# Altium PCB PCB1.PcbDoc
Units mil, origin at the board's own origin, x right, y up, seen from the top; angles counter-clockwise.
Board outline 5621.02 x 7460.53 mil, 2 copper layers (Top Layer, Bottom Layer); 12 components, 16 nets, 84 pads, 0 vias.
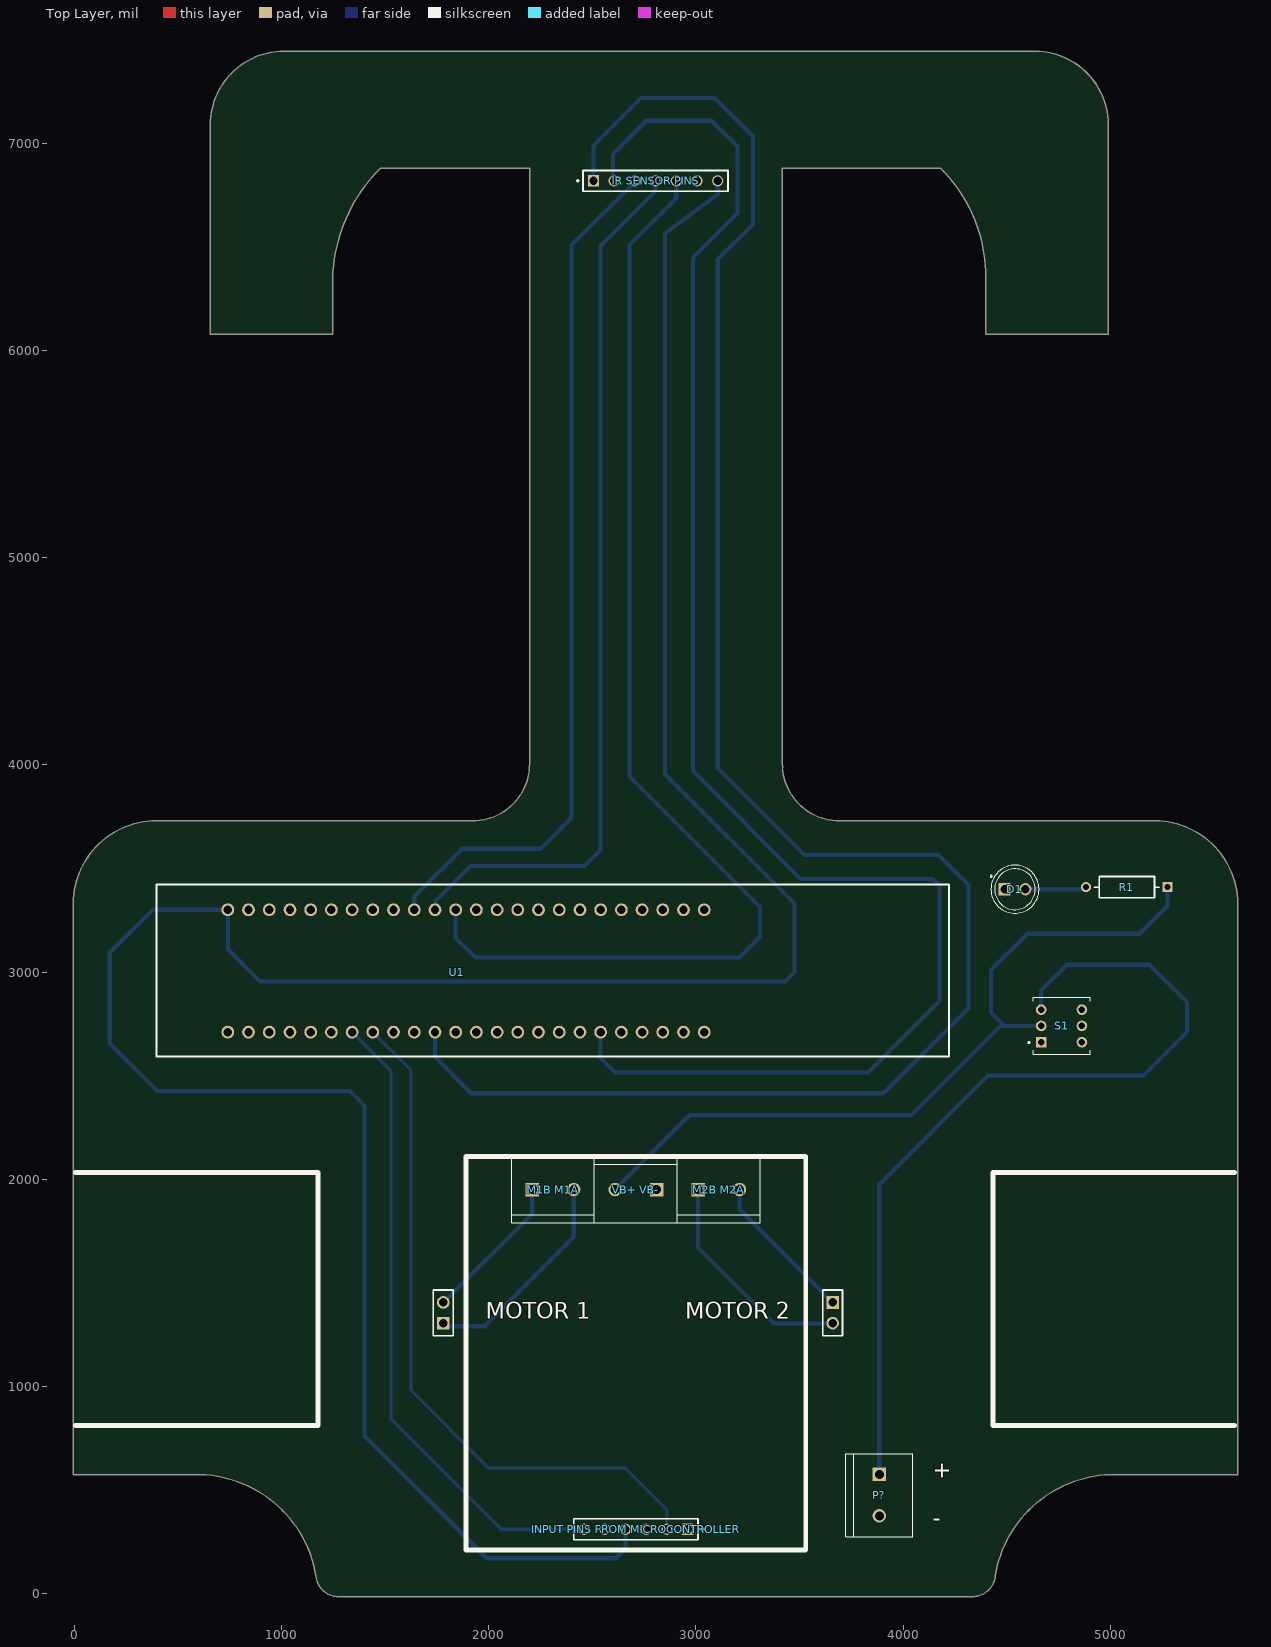
[diagram p0: Top Layer view]
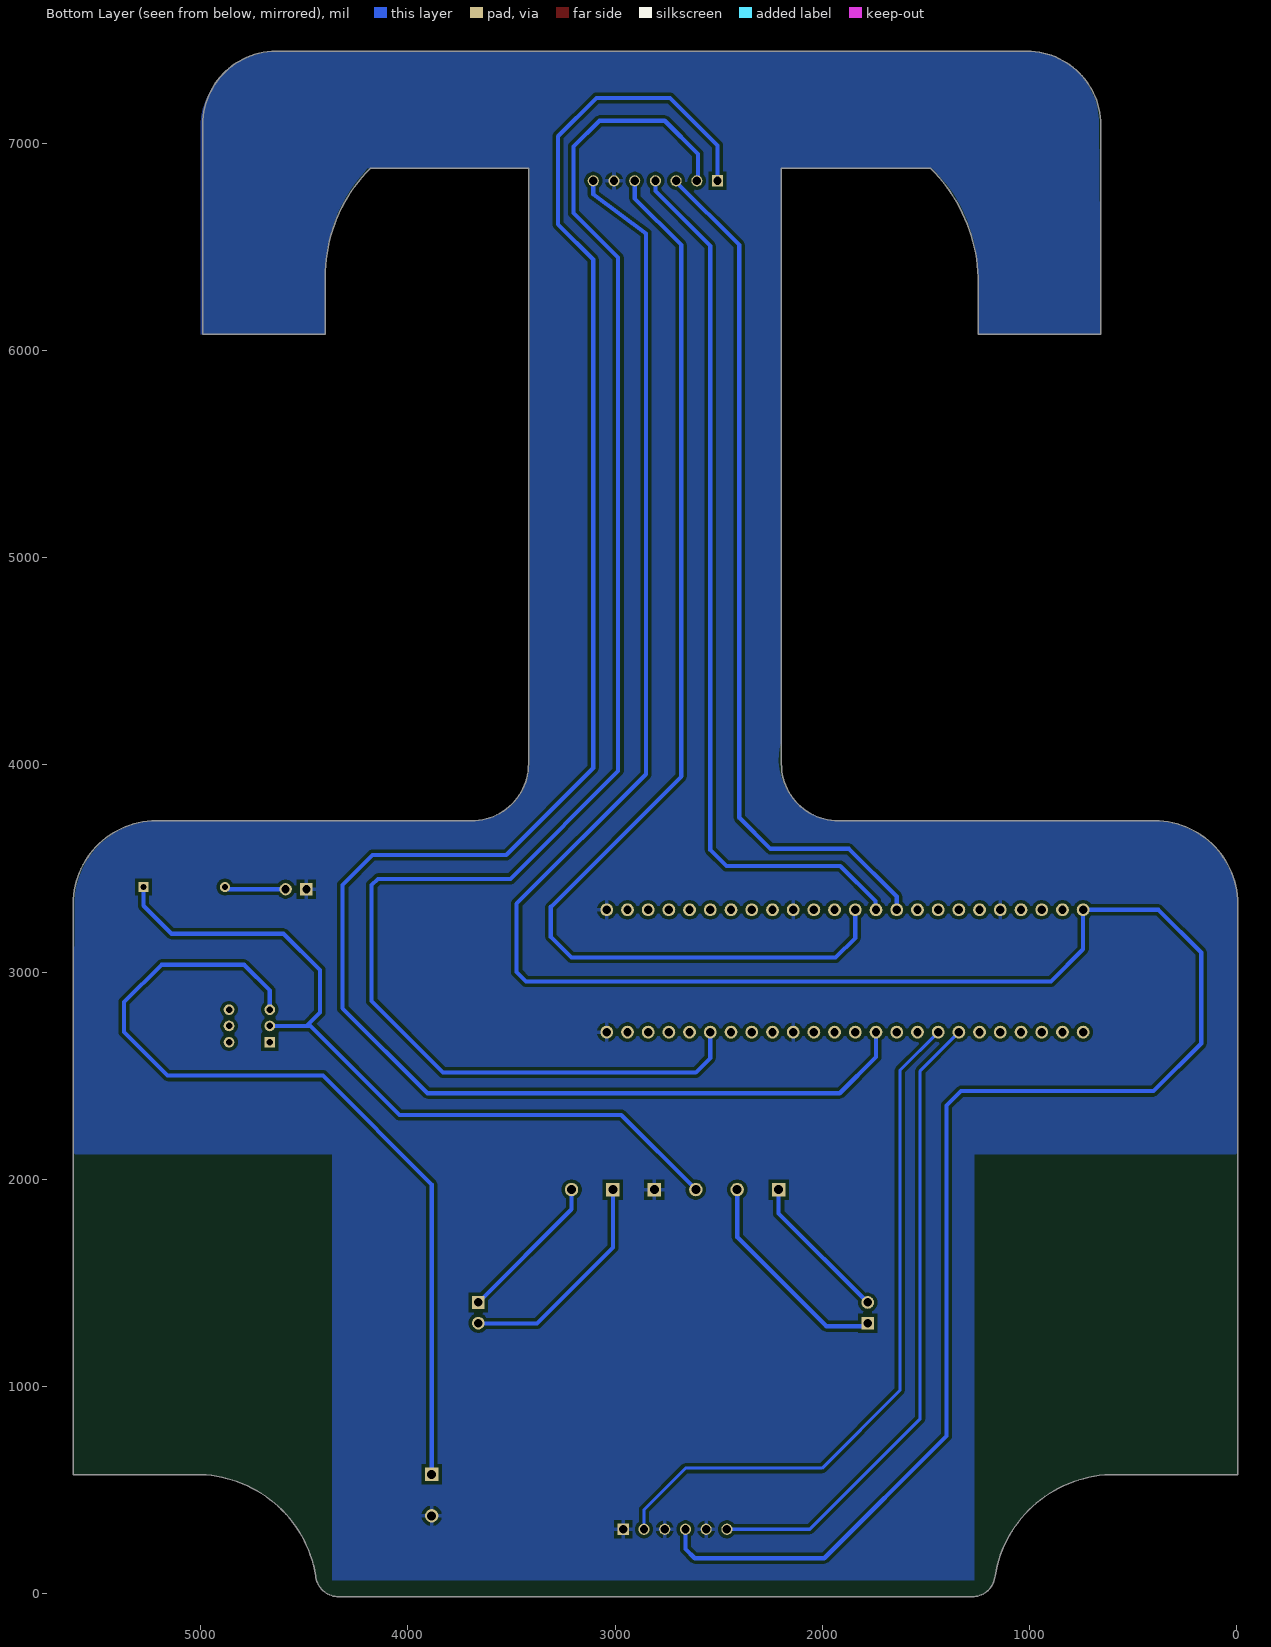
[diagram p1: Bottom Layer view, seen from below]
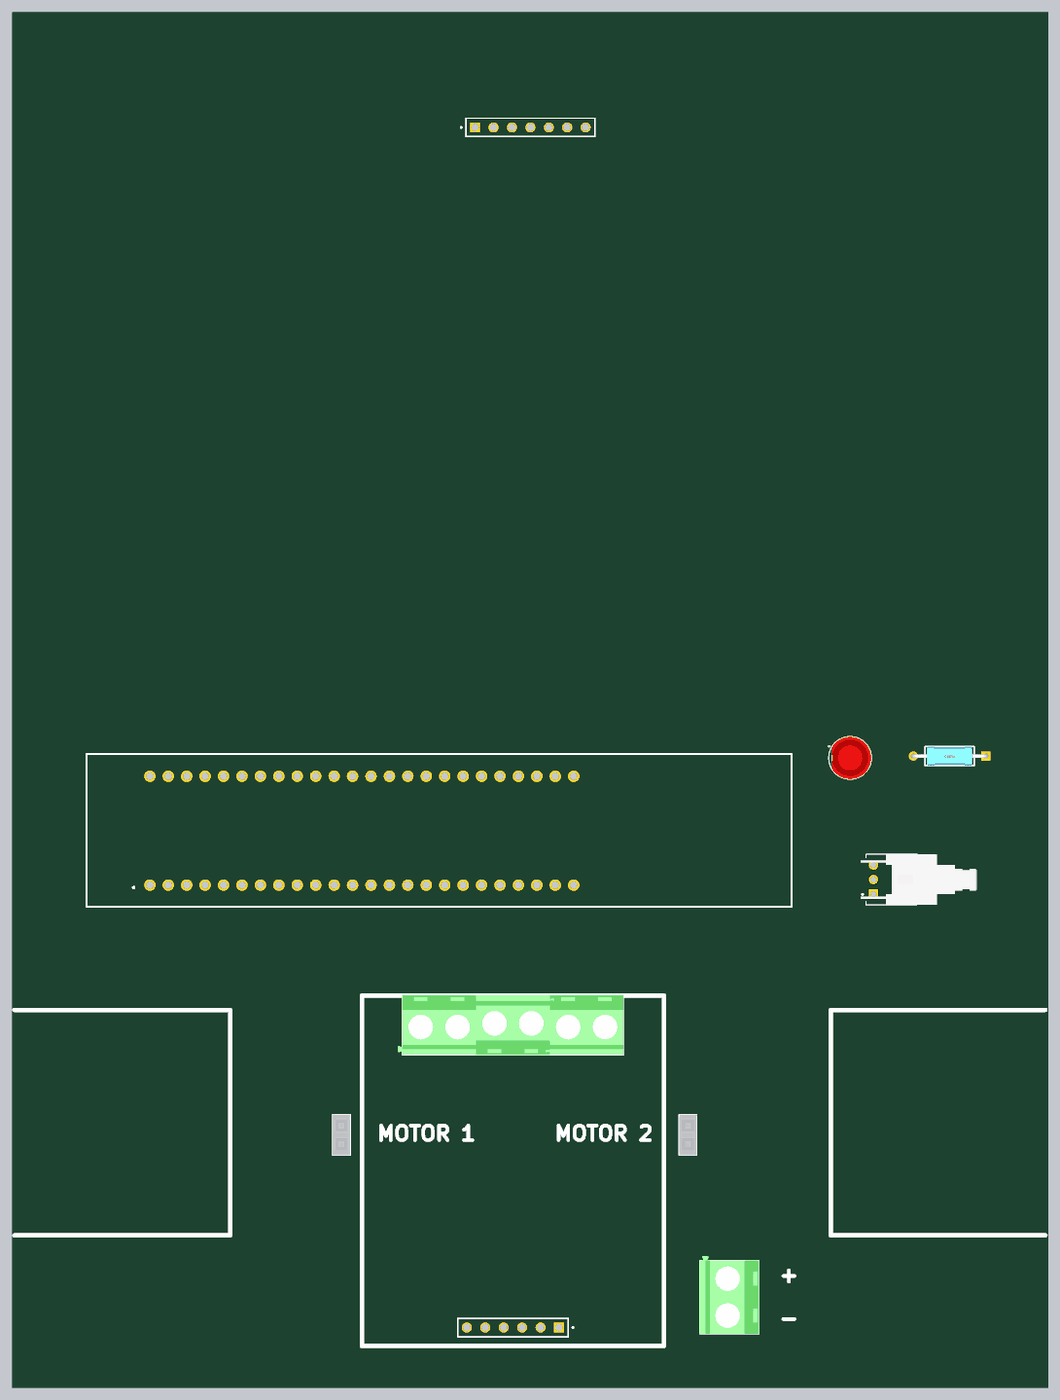
[diagram p2: 3D render of the assembled board from above, using the file's embedded part models]

## Layer stack, top to bottom
Top Solder: solder mask 0.4, Solder Resist, Dk 3.5
Top Layer: signal copper 1.4
Dielectric 1: dielectric 12.6, FR-4, Dk 4.8
Bottom Layer: signal copper 1.4
Bottom Solder: solder mask 0.4, Solder Resist, Dk 3.5

## Board outline
-5.87,574.09 584.69,574.09 cw(c589.52,-8.99) 1165,85 ccw(c1275,95) 1285,-15 4325,-15 ccw(c4335,95) 4445,85 cw(c5020.48,-8.99) 5025.31,574.09 5024.61,574.09 5615.16,574.09 5615.16,3330 ccw(c5215.16,3330) 5215.16,3730 3692.83,3730 cw(c3692.83,4005.59) 3417.24,4005.59 3417.24,6880 4181.85,6880 cw(c3656.33,6354.48) 4399.53,6354.48 4399.53,6080 4990.08,6080 4990.08,7092.55 ccw(c4637.55,7092.55) 4637.55,7445.08 1010.55,7445.08 ccw(c1010.55,7089.45) 654.92,7089.45 654.92,6080 1245.47,6080 1245.47,6324.16 cw(c2031.55,6324.16) 1475.71,6880 2196.85,6880 2196.85,4005.59 cw(c1921.26,4005.59) 1921.26,3730 394.13,3730 ccw(c394.13,3330) -5.87,3330

## Design rules (kind name [scope] priority, off if disabled: settings)
Clearance [All] p1: gap=15.75 ignorepadtopadclearanceinfootprint=FALSE
PolygonConnect [All] p1: connectstyle=Relief reliefconductorwidth=19.68 reliefentries=4 polygonreliefangle="90 Angle" airgapwidth=15.75
RoutingVias [All] p1: holewidth=28 width=50 viastyle="Through Hole" minholewidth=28 minwidth=50 maxholewidth=28 maxwidth=50
SolderMaskExpansion [All] p1: expansion=0 istentingtop=FALSE
SupplyNets "Schematic Supply Nets_2" [InNet('+5')] p1: voltage=0.000
SupplyNets "Schematic Supply Nets_1" [InNet('GND')] p2: voltage=0.000
Width [All] p1: maxlimit=20 minlimit=11.81 preferedwidth=13.78 toplayer_maxwidth=19.68 minimp=50.000000 maximp=50.000000 favimp=50.000000
30 further rules are at their usual default settings.

## Components (designator, comment, footprint, x,y, rotation, side; value= is the part's Value field where it differs from the comment)
D1 "WP7113SEC" LED_WP7113SEC 4540,3400 r0 top
"INPUT PINS FROM MICROCONTROLLER" "M1A M1B 5V GRND M2A M2B" SAMTEC_MTSW-106-07-L-S-170 2710,310 r0 top locked
"IR SENSOR PINS" "IR5 IR4 IR3 IR2 IR1 GND VCC" SAMTEC_MTSW-107-22-L-S-380 2805,6820 r180 top
"M1B M1A" "282837-2" TE_282837-2 2310,1950 r0 top locked
"M2B M2A" "282837-2" TE_282837-2 3110,1950 r0 top locked
"MOTOR 1" "SSW-102-02-F-S" SMTC-SSW-102-02-X-S 1780,1305 r90 top
"MOTOR 2" "SSW-102-02-F-S" SMTC-SSW-102-02-X-S 3660,1405 r270 top
P? "282837-2" TE_282837-2 3885,475 r270 top
R1 "MFR-25FBF52-1K18" FP-MFR-25-MFG 5080,3410 r180 top value=1.18kΩ
S1 "TL2230EEF100" SW_TL2230EEF100 4765,2740 r90 top
U1 "Curiosity nano + touch" PCBComponent_1 396.69,2591.89 r0 top locked
"VB+ VB-" "282837-2" TE_282837-2 2710,1950 r180 top locked

## Footprints (in the part's own frame and the unit in brackets; to place one, negate y for a bottom-side part, rotate by r counter-clockwise, add the part's x,y. Pads: shape width x height; smd on the part's side, far side on the other; paste and mask are expansions set on the pad)
FP-MFR-25-MFG [mm]
  rect 1.25x1.25 hole 0.75 paste-2539.97 mask+0: 1(-5,0)
  round 1.25 hole 0.75 paste-2539.97 mask+0: 2(5,0)
  silkscreen extent -3.98,-1.3 3.98,1.3, body extent -5.72,-1.4 5.72,1.4, height 0.25
LED_WP7113SEC [mm]
  round 1.508 hole 1: A(1.27,0)
  rect 1.508x1.508 / inner round 1.508 / far side rect 1.508x1.508 hole 1: C(-1.27,0)
  silkscreen extent -3.03,-2.95 2.95,2.95, body extent -2.5,-2.95 2.95,2.95, height 9.6
PCBComponent_1 [mm]
  round 1.57 hole 1.02: 1(8.72,3) 2(11.26,3) 3(13.8,3) 4(16.34,3) 5(18.88,3) 6(21.42,3) 7(23.96,3) 8(26.5,3) 9(29.04,3) 10(31.58,3) 11(34.12,3) 12(36.66,3) 13(39.2,3) 14(41.74,3) 15(44.28,3) 16(46.82,3) 17(49.36,3) 18(51.9,3) 19(54.44,3) 20(56.98,3) 21(59.52,3) 22(62.06,3) 23(64.6,3) 24(67.14,3) 25(67.14,18) 26(64.6,18) 27(62.06,18) 28(59.52,18) 29(56.98,18) 30(54.44,18) 31(51.9,18) 32(49.36,18) 33(46.82,18) 34(44.28,18) 35(41.74,18) 36(39.2,18) 37(36.66,18) 38(34.12,18) 39(31.58,18) 40(29.04,18) 41(26.5,18) 42(23.96,18) 43(21.42,18) 44(18.88,18) 45(16.34,18) 46(13.8,18) 47(11.26,18) 48(8.72,18)
  round 0.5 on Top Overlay: 23(6.477,2.667)
  silkscreen extent 0,0 97.16,21.08
SAMTEC_MTSW-106-07-L-S-170 [mm]
  rect 1.37x1.37 / inner round 1.37 / far side rect 1.37x1.37 hole 1.02: 01(6.35,0)
  round 1.37 hole 1.02: 02(3.81,0) 03(1.27,0) 04(-1.27,0) 05(-3.81,0) 06(-6.35,0)
  silkscreen extent -7.62,-1.27 8.37,1.27
SAMTEC_MTSW-107-22-L-S-380 [mm]
  rect 1.37x1.37 / inner round 1.37 / far side rect 1.37x1.37 hole 1.02: 01(7.62,0)
  round 1.37 hole 1.02: 02(5.08,0) 03(2.54,0) 04(0,0) 05(-2.54,0) 06(-5.08,0) 07(-7.62,0)
  silkscreen extent -8.89,-1.27 9.64,1.27
SMTC-SSW-102-02-X-S [mm] "SQ Post Socket, 1x2 Pins, Vertical, 2.54mm Pitch, Female"
  rect 1.55x1.55 hole 1.04: 1(0,0)
  round 1.55 hole 1.04: 2(2.54,0)
  silkscreen extent -1.53,-1.2 4.07,1.2, body extent -1.52,-1.21 4.06,1.21, height 8.51
SW_TL2230EEF100 [mm]
  rect 1.308x1.308 / inner round 1.308 / far side rect 1.308x1.308 hole 0.8 mask+0.102: 1(-2,2.5)
  round 1.308 hole 0.8 mask+0.102: 2(0,2.5) 3(2,2.5) 4(-2,-2.5) 5(0,-2.5) 6(2,-2.5)
  silkscreen extent -3.5,-3.5 3.5,4.1, body extent -3.5,-11.75 3.5,4.25, height 3.5
TE_282837-2 [mm]
  rect 1.65x1.65 / inner round 1.65 / far side rect 1.65x1.65 hole 1.1: 1(-2.54,0)
  round 1.65 hole 1.1: 2(2.54,0)
  silkscreen extent -5.08,-4.1 5.08,4.1, body extent -5.68,-4.1 5.08,4.1, height 10

## Part data
D1: "LED Thru-Hole Orange T1-3/4 5mm Clear Lens 30mA 610nm 2500mcd Round", Package="Radial Kingbright", Check_prices=https://www.snapeda.com/parts/WP7113SEC/Kingbright/view-part/?ref=eda, MF=Kingbright, MP=WP7113SEC, SnapEDA_Link=https://www.snapeda.com/parts/WP7113SEC/Kingbright/view-part/?ref=snap
"INPUT PINS FROM MICROCONTROLLER": library part MTSW-106-07-L-S-170, Package=None, Availability=Unavailable, MP=MTSW-106-07-L-S-170, Price=None
"IR SENSOR PINS": library part MTSW-107-22-L-S-380, Package=None, Availability=Unavailable, MP=MTSW-107-22-L-S-380, Price=None
"M1B M1A" "M2B M2A" P? "VB+ VB-": "Ð Ð°Ð·ÑŠÐµÐ¼Ð½Ñ‹Ðµ ÐºÐ»ÐµÐ¼Ð¼Ð½Ñ‹Ðµ ÐºÐ¾Ð»Ð¾Ð´ÐºÐ¸ Ð Ð¾Ð·ÐµÑ‚ÐºÐ° 2 Ð¿Ð¾Ð»Ð¾Ð¶ÐµÐ½Ð¸Ñ 5,08 Ð¼Ð¼ ÐŸÑ€Ð¸Ð¿Ð¾Ð¹ Ð¿Ñ€ÑÐ¼Ð¾Ð¹ Ñ‡ÐµÑ€ÐµÐ· Ð¾Ñ‚Ð²ÐµÑ€ÑÑ‚Ð¸Ðµ 13,5 Ð / ÐºÐ¾Ð½Ñ‚Ð°ÐºÑ‚", Package=None, Availability="In Stock", Check_prices=https://www.snapeda.com/parts/282837-2/TE+Connectivity+AMP+Connectors/view-part/?ref=eda, MF="TE Connectivity", MP=282837-2, Price=None, Purchase-URL=https://pricing.snapeda.com/search/part/282837-2/?ref=eda, SnapEDA_Link=https://www.snapeda.com/parts/282837-2/TE+Connectivity+AMP+Connectors/view-part/?ref=snap
"MOTOR 1" "MOTOR 2": library part CMP-1023-00322-1, "SQ Post Socket, Through-hole, Vertical, -55 to 125 degC, 2.54 mm Pitch, 2-Pin, Female, RoHS", Manufacturer=Samtec, Temperature Range="-55 to 125 degC", ComponentLink1Description="Manufacturer URL", ComponentLink1URL=http://www.samtec.com, ComponentLink2Description=Datasheet, ComponentLink2URL=http://www.samtec.com/documents/webfiles/pdf/SSW_TH.PDF, ComponentLink3Description="Package Specification", ComponentLink3URL=http://www.samtec.com/documents/webfiles/cpdf/SSW-1XX-XX-XXX-X-XX-XXX-XX-MKT.pdf, DatasheetVersion=F-214, Mounting Technology=Through-hole, Orientation=Vertical, PackageDescription="Assembly, Socket Strip .016 X .031 Tail", PackageReference=SSW-102-02-X-S, PackageVersion="CA, 6/1987", PartNumber=SSW-102-02-F-S, Pitch="2.54 mm", RoHS=True
R1: library part CMP-03413-000001-1, "RES 1.18K OHM 1/4W 1% AXIAL", Manufacturer=Yageo, Package=MFR-25, Power Rating=0.25W, Resistance=1.18kΩ, Temperature="-55°C to +155°C", Temperature Coefficient=100ppm/°C, Temperature Range High=+155°C, Temperature Range Low=-55°C, Tolerance=1%, Voltage Rating=250V, Automotive=No, Category=Res, ComponentLink2Description=Datasheet, ComponentLink2URL=https://www.yageo.com/upload/media/product/products/datasheet/lr/Yageo_LR_MFR_1.pdf, Composition="Metal Film", Device Class L1="Passive Components", Device Class L2=Resistors, Device Class L3="Through-Hole Resistors", Digikey Description="RES 1.18K OHM 1/4W 1% AXIAL", Height=2.6mm, Ipc Land Pattern Name=RESAD1000W75L680D260, Lead Free=Yes, Manufacturer Part Number=MFR-25FBF52-1K18, Mouser Description="Metal Film Resistors 1.18K OHM 1/4W 1%", Octopart=https://octopart.com/mfr-25fbf52-1k18-yageo-56251681, RoHS=TRUE, Series=MFR
S1: "PUSHBUTTON, 100mA, 30VDC DPDT, On-On Through Hole", Package=None, Check_prices=https://www.snapeda.com/parts/TL2230EEF100/E-Switch/view-part/?ref=eda, MF=E-Switch, MP=TL2230EEF100, SnapEDA_Link=https://www.snapeda.com/parts/TL2230EEF100/E-Switch/view-part/?ref=snap

## Nets (pads, with @x,y where several pads share a name; then routed paths per layer and width w, separated by ;. In a path a pad name is that pad's centre, name@x,y a point inside that pad or via, vN(x,y) a via of type N, cw(c..) or ccw(c..) an arc to the next point about the centre after c; other vN are vias at no path point)
+5: "INPUT PINS FROM MICROCONTROLLER.04" "IR SENSOR PINS.07" U1.48 | length 12877.7
  Bottom Layer w20: 2660,310 2660,215 2615,170 1990,170 1400,760 1400,2355 1330,2425 400,2425 170,2655 170,3095 375.55,3300.55 U1.48 740,3110 895,2955 3430,2955 3475,3000 3475,3330 2850,3955 2850,6565 3105,6755 3105,6820
GND: "INPUT PINS FROM MICROCONTROLLER.01" "INPUT PINS FROM MICROCONTROLLER.03" "INPUT PINS FROM MICROCONTROLLER.05" "IR SENSOR PINS.06" "VB+ VB-.1" D1.C P?.2 U1.15 U1.24 U1.25 U1.34 U1.44
NetD1_A: D1.A R1.2 | length 297.3
  Bottom Layer w20: D1.A 4865.24,3400 4875.24,3410 R1.2
"NetINPUT PINS FROM MICROCONTROLLER_02": "INPUT PINS FROM MICROCONTROLLER.02" U1.8 | length 3374.8
  Bottom Layer w15: U1.8 1625,2525 1625,980 2000,605 2660,605 2860,405 2860,310
"NetINPUT PINS FROM MICROCONTROLLER_06": "INPUT PINS FROM MICROCONTROLLER.06" U1.7 | length 3098.2
  Bottom Layer w15: U1.7 1527.19,2522.82 1527.19,842.82 2060,310 2460,310
"NetIR SENSOR PINS_01": "IR SENSOR PINS.01" U1.11 | length 9208.7
  Bottom Layer w20: U1.11 1740,2590 1915,2415 3905,2415 4315,2825 4315,3420 4170,3565 3525,3565 3105,3985 3105,6440 3275,6610 3275,7035 3090,7220 2735,7220 2505,6990 2505,6820
"NetIR SENSOR PINS_02": "IR SENSOR PINS.02" U1.19 | length 7863.9
  Bottom Layer w20: U1.19 2540,2585 2610,2515 3830,2515 4175,2860 4175,3420 4145,3450 3505,3450 2985,3970 2985,6450 3200,6665 3200,6985 3075,7110 2760,7110 2600,6950 2600,6825 2605,6820
"NetIR SENSOR PINS_03": "IR SENSOR PINS.03" U1.39 | length 4183.2
  Bottom Layer w20: U1.39 1640,3365 1870,3595 2250,3595 2400,3745 2400,6510 2705,6815 2705,6820
"NetIR SENSOR PINS_04": "IR SENSOR PINS.04" U1.38 | length 4282.8
  Bottom Layer w20: U1.38 1742.96,3303.52 1742.96,3342.96 1912.5,3512.5 2462.5,3512.5 2540,3590 2540,6505 2805,6770 2805,6820
"NetIR SENSOR PINS_05": "IR SENSOR PINS.05" U1.37 | length 5690.5
  Bottom Layer w20: U1.37 1840,3165 1935,3070 3210,3070 3310,3170 3310,3315 2680,3945 2680,6510 2905,6735 2905,6820
"NetM1B M1A_1": "M1B M1A.1" "MOTOR 1.2" | length 723.1
  Bottom Layer w20: 1780,1405 2210,1835 2210,1950
"NetM1B M1A_2": "M1B M1A.2" "MOTOR 1.1" | length 1044.3
  Bottom Layer w20: 1780,1305 1795,1290 1980,1290 2410,1720 2410,1950
"NetM2B M2A_1": "M2B M2A.1" "MOTOR 2.2" | length 1082.6
  Bottom Layer w20: 3010,1950 3010,1670 3376.72,1303.28 3658.28,1303.28 3660,1305
"NetM2B M2A_2": "M2B M2A.2" "MOTOR 2.1" | length 731.4
  Bottom Layer w20: 3210,1950 3210,1855 3660,1405
NetP?_1: P?.1 S1.3 | length 4256.4
  Bottom Layer w20: P?.1 3885,1975 4410,2500 5160,2500 5370,2710 5370,2855 5190,3035 4790,3035 4666.57,2911.57 S1.3
NetR1_1: "VB+ VB-.2" R1.1 S1.2 | length 3751
  Bottom Layer w20: 2610,1950 2970,2310 4040,2310 4470,2740 4490,2740 ; S1.2 4490,2740 ; R1.1 5276.85,3320 5141.85,3185 4600,3185 4425,3010 4425,2805 4490,2740
pads on no net: S1.1 S1.4 S1.5 S1.6 U1.1 U1.2 U1.3 U1.4 U1.5 U1.6 U1.9 U1.10 U1.12 U1.13 U1.14 U1.16 U1.17 U1.18 U1.20 U1.21 U1.22 U1.23 U1.26 U1.27 U1.28 U1.29 U1.30 U1.31 U1.32 U1.33 U1.35 U1.36 U1.40 U1.41 U1.42 U1.43 U1.45 U1.46 U1.47

## Polygon pours and split planes (outlines as drawn)
GND on Bottom Layer "NONET_L02_P-001" (solid, pour order 0): 15,731.65 1265,730 1265,2120 -5.88,2120 -5.79,3322.42 cw(c405.23,3318.96) 405,3730 1912.48,3730 ccw(c1912.48,4028.39) 2196.85,4118.75 2196.85,6880 1467.8,6880 ccw(c1972.68,6358.36) 1246.82,6370.19 1245.47,6080 654.92,6080 665,7100 cw(c1010,7100) 1010,7445 4630,7445 cw(c4630,7075) 5000,7075 5000,6080 4399.53,6080 4399.53,6354.48 ccw(c3662.96,6370.37) 4195,6880 3412.79,6880 3412.79,4000.38 ccw(c3688,4005.21) 3692.83,3730 ccw(c3694.42,3731.6) 3696.01,3730 5185,3730 5215,3730 cw(c5207.51,3329.93) 5607.58,3322.42 5615.16,2120 4365,2120 4365,730.63 4365,65 1265,65 1265,730

## Silkscreen, mask and mechanical layers (free items; w line width, h text height)
Top Overlay:
  lines w23.62: 5,810.39 1176.1,810.39 1176.1,2033.11 5,2033.11 ; 5600,810.39 4435,810.39 4435,2033.11 5600,2033.11 ; 1890,210 1890,2110 3530.16,2110 3530.16,210 1890,210
  text "+" at 4143.62,558.62 h78.74
  text "-" at 4143.62,324.26 h78.74